# EAGLE board fduino (EAGLE 9.3.1)
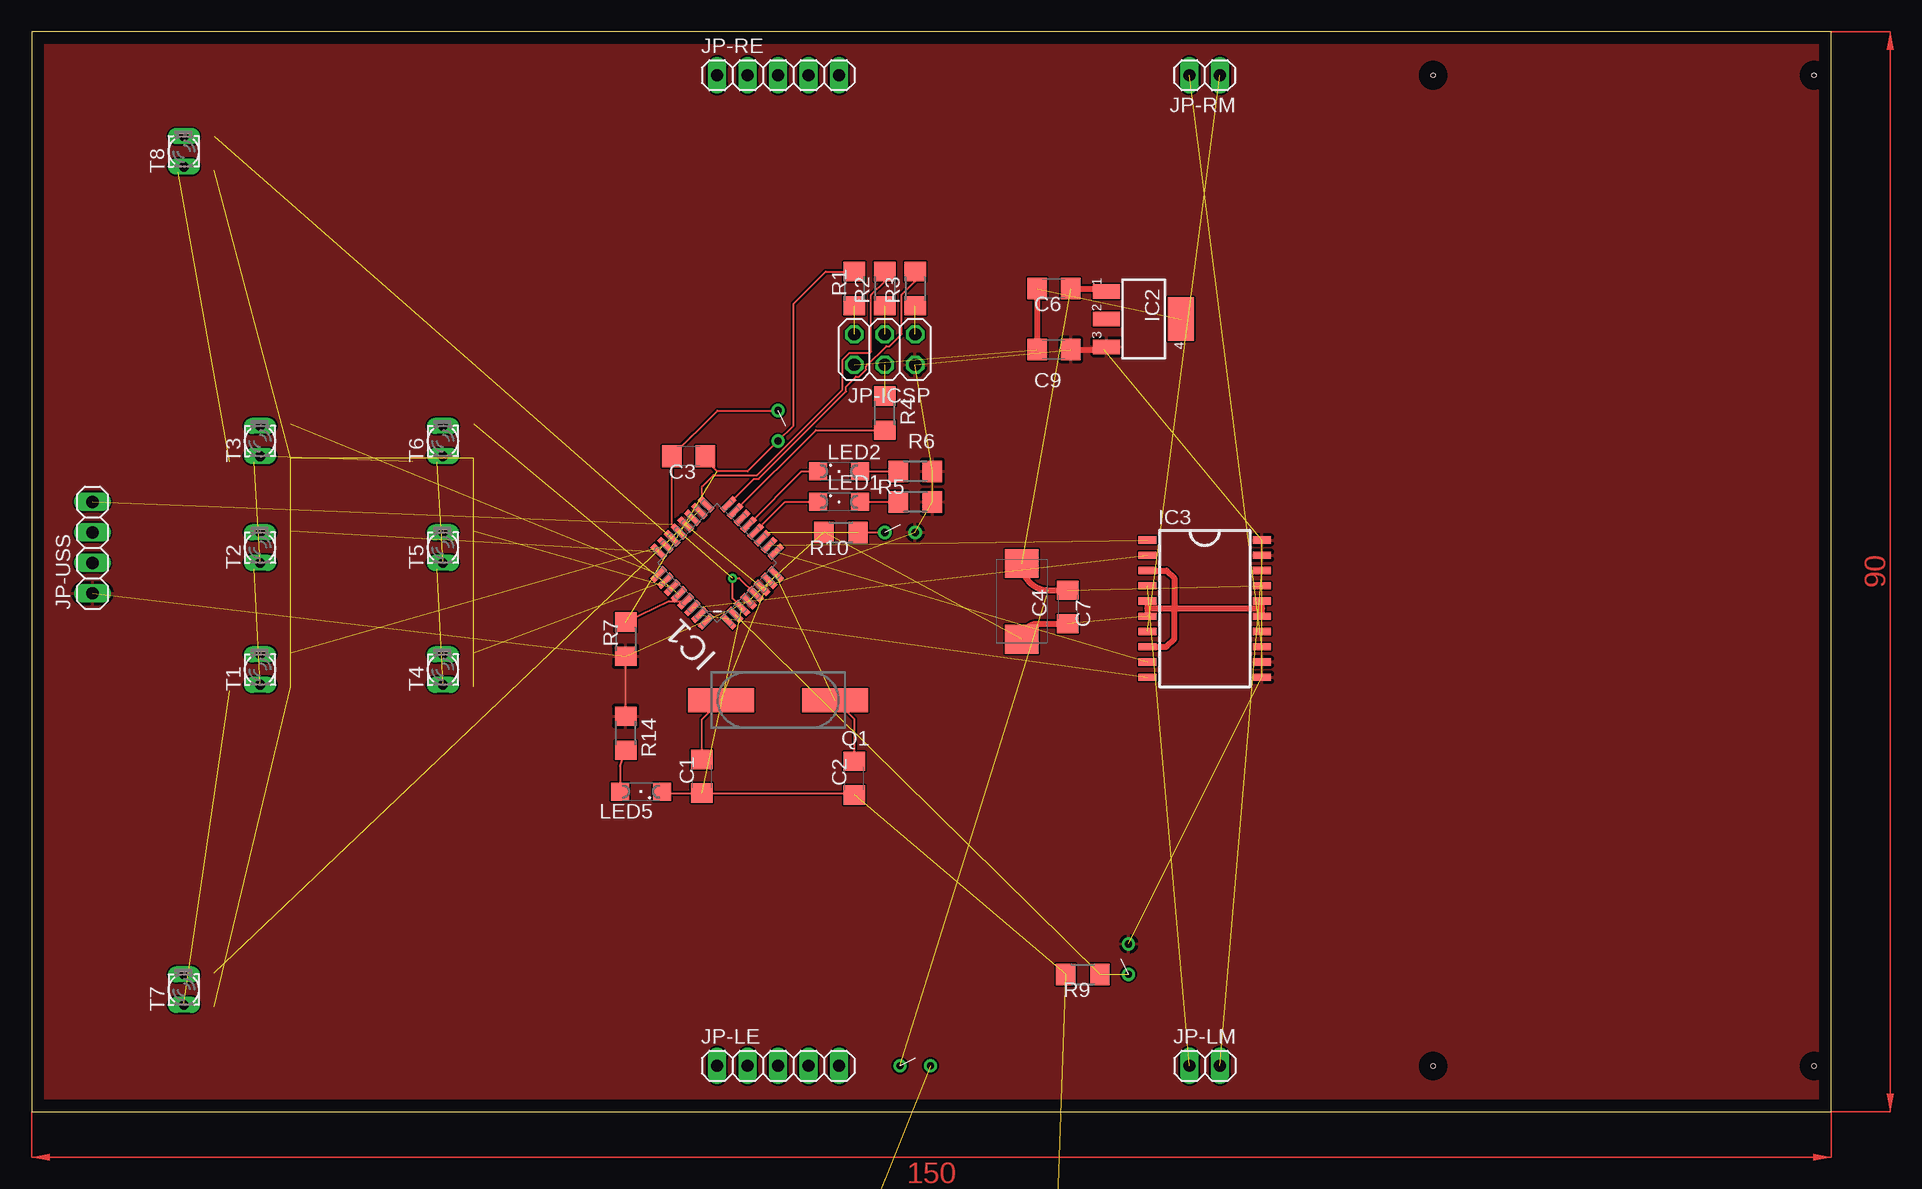
[diagram p0: board, top side]
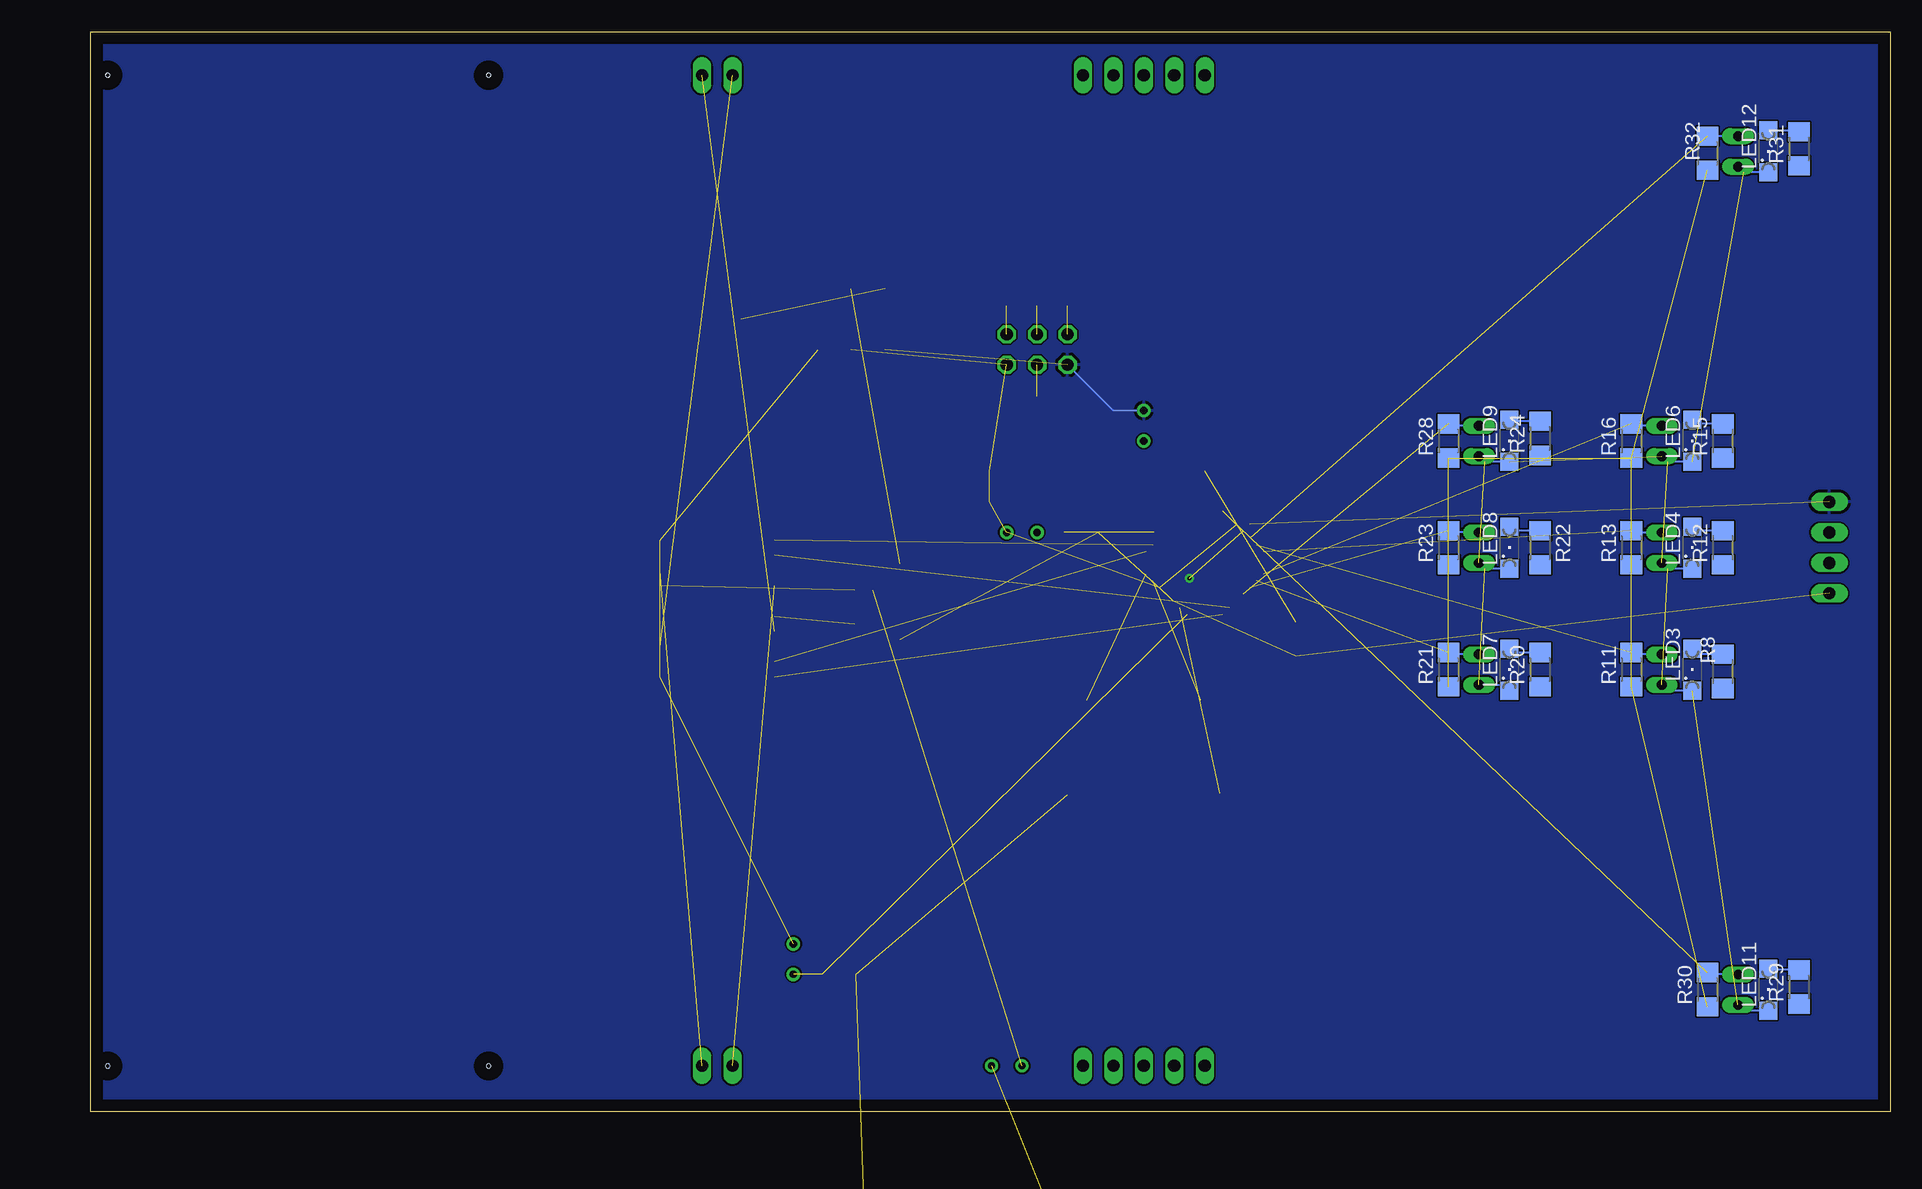
[diagram p1: board, bottom side, seen from below]

Size 150 x 90 mm. Coordinates in mm from the lower left corner, seen from the top.
Outline: 0,0 150,0 150,90 0,90 0,0
Copper layers (1*16): Top 0.035mm / dielectric 1.5mm / Bottom 0.035mm
Design rules "default": minimum track width 6mil, minimum drill 0.35mm, track to track 6mil, track to pad 6mil, pad to pad 6mil, via to via 6mil, smd to smd 6mil, copper to edge 40mil, drill to drill 6mil, minimum pad ring 10mil, minimum via ring 8mil, stop-mask expansion 4mil, vias tented up to drill 0mil, thermal gap 10mil
Holes 0.35 mm at 116.84,3.81 148.59,3.81 116.84,86.36 148.59,86.36

## Footprints (pad centres in the part's own frame; a part is rotated, then mirrored left to right if it is on the bottom)
C1206 = smd 1.6 x 1.8: 1 -1.4,0; 2 1.4,0
SMC_D = smd 2.4 x 2.8: + -3.15,0; - 3.15,0
TQFP32 = smd 1.473 x 0.508: 1 -4.115,2.794; 2 -4.115,2.007; 3 -4.115,1.194; 4 -4.115,0.406; 5 -4.115,-0.406; 6 -4.115,-1.194; 7 -4.115,-2.007; 8 -4.115,-2.794; 17 4.115,-2.794; 18 4.115,-2.007; 19 4.115,-1.194; 20 4.115,-0.406; 21 4.115,0.406; 22 4.115,1.194; 23 4.115,2.007; 24 4.115,2.794 | smd 0.508 x 1.473: 9 -2.794,-4.115; 10 -2.007,-4.115; 11 -1.194,-4.115; 12 -0.406,-4.115; 13 0.406,-4.115; 14 1.194,-4.115; 15 2.007,-4.115; 16 2.794,-4.115; 25 2.794,4.115; 26 2.007,4.115; 27 1.194,4.115; 28 0.406,4.115; 29 -0.406,4.115; 30 -1.194,4.115; 31 -2.007,4.115; 32 -2.794,4.115
SOT223 = smd 1.219 x 2.235: 1 -2.311,-3.099; 2 0,-3.099; 3 2.311,-3.099 | smd 3.6 x 2.2: 4 0,3.099
SO20 = smd 0.6 x 1.5: 1 -5.715,-4.78; 2 -4.445,-4.78; 3 -3.175,-4.78; 4 -1.905,-4.78; 5 -0.635,-4.78; 6 0.635,-4.78; 7 1.905,-4.78; 8 3.175,-4.78; 9 4.445,-4.78; 10 5.715,-4.78; 11 5.715,4.78; 12 4.445,4.78; 13 3.175,4.78; 14 1.905,4.78; 15 0.635,4.78; 16 -0.635,4.78; 17 -1.905,4.78; 18 -3.175,4.78; 19 -4.445,4.78; 20 -5.715,4.78
2X03 = drill 1.016 octagon: 1 -2.54,-1.27; 2 -2.54,1.27; 3 0,-1.27; 4 0,1.27; 5 2.54,-1.27; 6 2.54,1.27
1X05 = drill 1.016 long: 1 -5.08,0; 2 -2.54,0; 3 0,0; 4 2.54,0; 5 5.08,0
1X02 = drill 1.016 long: 1 -1.27,0; 2 1.27,0
1X04 = drill 1.016 long: 1 -3.81,0; 2 -1.27,0; 3 1.27,0; 4 3.81,0
SML1206 = smd 1.5 x 1.5: A 1.75,0; C -1.75,0
CSM-7X-DU = smd 5.5 x 2: 1 -4.75,0; 2 4.75,0
R1206 = smd 1.6 x 1.803: 1 -1.422,0; 2 1.422,0
SWITCH = drill 0.6: P$1 -1.27,0; P$2 1.27,0
BPX81 = drill 0.813 long: C 1.27,0; E -1.27,0
BAT2X18650 = drill 1.6 pad 3: +@1 -38.1,10.16; +@2 -38.1,-8.89; -@1 38.1,10.16; -@2 38.1,-8.89 | hole 3: -29.21,-8.89; 26.67,-8.89; -29.21,10.16; 26.67,10.16

## Placement (x,y rotation side)
C1  22p  [C1206]  55.88,27.94 90 top
C2  22p  [C1206]  68.58,27.79 90 top
C3  100n  [C1206]  54.76,54.61 180 top
C4  100u  [SMC_D]  82.55,42.52 270 top
C6  100n  [C1206]  85.22,68.58 180 top
C7  100n  [C1206]  86.36,42.04 270 top
C9  100n  [C1206]  85.22,63.5 180 top
IC1  ATMEGA328PMA  [TQFP32]  57.15,45.72 135 top
IC2  LF50  [SOT223]  92.71,66.04 270 top
IC3  L6205  [SO20]  97.79,41.91 270 top
JP-ICSP  [2X03]  71.12,63.5 180 top
JP-LE  [1X05]  62.23,3.81 0 top
JP-LM  [1X02]  97.79,3.81 0 top
JP-RE  [1X05]  62.23,86.36 0 top
JP-RM  [1X02]  97.79,86.36 180 top
JP-USS  [1X04]  5.08,46.99 90 top
LED1  Purple  [SML1206]  67.31,50.8 0 top
LED2  Purple  [SML1206]  67.31,53.34 0 top
LED3  White  [SML1206]  16.51,36.83 90 bottom
LED4  White  [SML1206]  16.51,46.99 90 bottom
LED5  Orange  [SML1206]  50.8,26.67 180 top
LED6  White  [SML1206]  16.51,55.88 90 bottom
LED7  White  [SML1206]  31.75,36.83 90 bottom
LED8  White  [SML1206]  31.75,46.99 90 bottom
LED9  White  [SML1206]  31.75,55.88 90 bottom
LED11  White  [SML1206]  10.16,10.16 90 bottom
LED12  White  [SML1206]  10.16,80.01 90 bottom
Q1  CSM-7X-DU  [CSM-7X-DU]  62.23,34.29 180 top
R1  120  [R1206]  68.58,68.58 90 top
R2  120  [R1206]  71.12,68.58 90 top
R3  120  [R1206]  73.66,68.58 90 top
R4  120  [R1206]  71.12,58.2 270 top
R5  680  [R1206]  73.66,50.8 0 top
R6  680  [R1206]  73.66,53.34 0 top
R7  100k  [R1206]  49.53,39.37 90 top
R8  220  [R1206]  13.97,36.68 90 bottom
R9  1k  [R1206]  87.63,11.43 180 top
R10  1k  [R1206]  67.46,48.26 180 top
R11  1k  [R1206]  21.59,36.83 90 bottom
R12  220  [R1206]  13.97,46.99 90 bottom
R13  1k  [R1206]  21.59,46.99 90 bottom
R14  220  [R1206]  49.53,31.53 270 top
R15  220  [R1206]  13.97,55.88 90 bottom
R16  1k  [R1206]  21.59,55.88 90 bottom
R20  220  [R1206]  29.21,36.83 90 bottom
R21  1k  [R1206]  36.83,36.83 90 bottom
R22  220  [R1206]  29.21,46.99 90 bottom
R23  1k  [R1206]  36.83,46.99 90 bottom
R24  220  [R1206]  29.21,56.1 90 bottom
R28  1k  [R1206]  36.83,55.88 90 bottom
R29  220  [R1206]  7.62,10.38 90 bottom
R30  1k  [R1206]  15.24,10.16 90 bottom
R31  220  [R1206]  7.62,80.23 90 bottom
R32  1k  [R1206]  15.24,79.86 90 bottom
SW1  SWITCHTHT  [SWITCH]  62.23,57.15 270 top
SW2  SWITCHTHT  [SWITCH]  91.44,12.7 90 top
SW3  SWITCHTHT  [SWITCH]  72.39,48.26 0 top
SW4  SWITCHTHT  [SWITCH]  73.66,3.81 0 top
T1  BPX81  [BPX81]  19.05,36.83 90 top
T2  BPX81  [BPX81]  19.05,46.99 90 top
T3  BPX81  [BPX81]  19.05,55.88 90 top
T4  BPX81  [BPX81]  34.29,36.83 90 top
T5  BPX81  [BPX81]  34.29,46.99 90 top
T6  BPX81  [BPX81]  34.29,55.88 90 top
T7  BPX81  [BPX81]  12.7,10.16 90 top
T8  BPX81  [BPX81]  12.7,80.01 90 top
U$2  BAT  [BAT2X18650]  40.64,-167.64 0 top  (outside the outline)
U$3  BAT  [BAT2X18650]  40.64,-209.55 0 top  (outside the outline)

## Library data of the parts
C1-C4 C6 C7 C9 = rcl; SPICEPREFIX: C
IC1 IC3 SW1-SW4 U$2 U$3 = martinmake
IC2 = linear
JP-ICSP JP-LE JP-LM JP-RE JP-RM JP-USS = pinhead
LED1-LED9 LED11 LED12 = led
Q1 = crystal; OC_FARNELL: unknown; OC_NEWARK: unknown
R1-R16 R20-R24 R28-R32 = rcl; SPICEPREFIX: R
T1-T8 = opto-trans-siemens; OC_FARNELL: unknown; OC_NEWARK: unknown

## Nets
!RESET: C3.1 IC1.29 R1.2 R7.2 SW1.P$2
!SS: IC1.14
ADC0: IC1.23 R11.2 T1.C
ADC1: IC1.24 R13.2 T2.C
ADC2: IC1.25 R16.2 T3.C
ADC3: IC1.26 R21.2 T4.C
ADC4: IC1.27 R23.2 T5.C
ADC5: IC1.28 R28.2 T6.C
ADC6: IC1.19 R30.2 T7.C
ADC7: IC1.22 R32.2 T8.C
DIRA: IC1.30 IC3.2
DIRB: IC1.31 IC3.10
ECHO: JP-USS.3
GND: C1.1 C2.1 C3.2 C4.- C6.2 C7.2 C9.2 IC1.3 IC1.5 IC1.21 IC2.4 IC3.3 IC3.5 IC3.6 IC3.8 IC3.15 IC3.16 JP-ICSP.6 JP-USS.4 LED5.C R9.2 R10.2 SW1.P$1 U$3.-@1
GND2: LED3.C LED4.C LED6.C LED7.C LED8.C LED9.C LED11.C LED12.C T1.E T2.E T3.E T4.E T5.E T6.E T7.E T8.E
INT0: IC1.32
INT1: IC1.1
MISO: IC1.16 R3.2
MOSI: IC1.15 R4.2
N$1: LED6.A R15.2
N$3: IC3.13 JP-RM.2
N$4: LED2.A R6.1
N$5: LED1.A R5.1
N$6: IC3.7 JP-RM.1
N$7: IC3.4 JP-LM.1
N$8: IC3.18 JP-LM.2
N$9: U$3.+@1 U$3.-@2
N$10: U$2.+@1 U$2.-@2
N$12: LED7.A R20.2
N$13: JP-LE.5
N$14: SW4.P$2 U$2.+@2
N$15: U$2.-@1 U$3.+@2
N$22: LED12.A R31.2
N$23: LED8.A R22.2
N$24: R20.1
N$26: JP-LE.4
N$27: LED9.A R24.2
N$28: R22.1
N$29: JP-LE.3
N$30: LED11.A R29.2
N$31: JP-LE.2
N$32: R15.1
N$33: JP-ICSP.1 R3.1
N$34: JP-LE.1
N$35: R24.1
N$36: LED5.A R14.2
N$37: JP-RE.1
N$38: R29.1
N$39: JP-RE.3
N$40: R12.1
N$41: R31.1
N$42: R11.1 R13.1 R16.1 R21.1 R23.1 R28.1 R30.1 R32.1
N$43: LED4.A R12.2
N$44: JP-RE.2
N$45: R8.1
N$46: JP-RE.5
N$47: LED3.A R8.2
N$48: JP-RE.4
N$49: JP-ICSP.3 R2.1
N$50: JP-ICSP.5 R1.1
N$51: JP-ICSP.4 R4.1
OC0A: IC1.10 IC3.1
OC0B: IC1.9 IC3.9
PB0: IC1.12 LED1.C
PB1: IC1.13 LED2.C
SCK: IC1.17 R2.2
SW1: IC1.2 R9.1 SW2.P$1
SW2: IC1.11 R10.1 SW3.P$1
TRIG: JP-USS.2
VCC: C9.1 IC1.4 IC1.6 IC1.18 IC1.20 IC2.3 IC3.11 IC3.12 IC3.19 IC3.20 JP-ICSP.2 JP-USS.1 R5.2 R6.2 R7.1 R14.1 SW2.P$2 SW3.P$2
VM: C4.+ C6.1 C7.1 IC2.1 IC3.14 IC3.17 SW4.P$1
XTAL1: C1.2 IC1.7 Q1.2
XTAL2: C2.2 IC1.8 Q1.1

## Tracks (layer width: path | path; a pad name or v marks a point on that pad's centre or on a via)
!RESET  (1 unrouted)
  Top 0.152: IC1.29 53.15,42.52 R7.2 | C3.1 56.16,54.33 57.15,53.34 59.69,53.34 SW1.P$2 63.5,57.15 63.5,67.31 66.19,70 R1.2
ADC0  (1 unrouted)
  Bottom 0.152: T1.C 21.44,38.1 R11.2
ADC1  (1 unrouted)
  Bottom 0.152: R13.2 21.44,48.26 T2.C
ADC2  (1 unrouted)
  Bottom 0.152: T3.C 21.44,57.15 R16.2
ADC3  (1 unrouted)
  Bottom 0.152: T4.C 36.68,38.1 R21.2
ADC4  (1 unrouted)
  Bottom 0.152: T5.C 36.68,48.26 R23.2
ADC5  (1 unrouted)
  Bottom 0.152: T6.C 36.68,57.15 R28.2
ADC6  (1 unrouted)
  Bottom 0.152: T7.C 15.09,11.43 R30.2
ADC7  (1 unrouted)
  Bottom 0.152: T8.C R32.2
DIRA  (1 unrouted)
DIRB  (1 unrouted)
GND  (via drill 0.35)  (10 unrouted)
  Top 0.152: IC1.5 | IC1.3 58.42,42.76 v58.42,44.45 58.99,44.45 IC1.5 | C2.1 68.43,26.54 C1.1 52.68,26.54 LED5.C | IC1.21 53.36,48.93 C3.2 57.17,58.42 SW1.P$1
  Top 0.5: C4.- arc-90 83.82,40.64 C7.2 | C6.2 C9.2 | IC3.5 93.01,41.91 | 93.01,41.91 IC3.6 | IC3.15 102.57,41.91 | 102.57,41.91 IC3.16 | 102.57,41.91 95.25,41.91 | 95.25,41.91 93.01,41.91 | IC3.3 94.61,45.09 95.25,44.45 95.25,41.91 | IC3.8 94.61,38.73 95.25,39.37 95.25,41.91
  Bottom 0.152: SW1.P$1 64.77,58.42 JP-ICSP.6
  pour Bottom: 0,0 150,0 150,90 0,90
GND2  (7 unrouted)
  Bottom 0.152: LED4.C 18.57,45.24 T2.E | LED6.C 18.57,54.13 T3.E | LED12.C 12.22,78.26 T8.E | LED9.C 33.81,54.13 T6.E | LED8.C 33.81,45.24 T5.E | LED3.C 18.57,35.08 T1.E | T4.E 32.23,35.56 LED7.C | LED11.C 12.22,8.41 T7.E
MISO
  Top 0.152: R3.2 73.66,69.18 72.53,68.05 72.53,64.78 71.53,63.78 71.26,63.78 69.57,62.09 69.57,61.82 68.99,61.24 68.72,61.24 67.89,60.42 67.89,60.01 60.62,52.73 60.21,52.73 IC1.16
MOSI
  Top 0.152: IC1.15 65.37,56.78 R4.2
N$1
  Bottom 0.152: R15.2 16.18,57.3 LED6.A
N$3  (1 unrouted)
N$4
  Top 0.152: LED2.A R6.1
N$5
  Top 0.152: LED1.A R5.1
N$6  (1 unrouted)
N$7  (1 unrouted)
N$8  (1 unrouted)
N$9  (1 unrouted)
N$10  (1 unrouted)
N$12
  Bottom 0.152: R20.2 31.42,38.25 LED7.A
N$14  (1 unrouted)
N$15  (1 unrouted)
N$22
  Bottom 0.152: LED12.A 7.73,81.76 R31.2
N$23
  Bottom 0.152: R22.2 31.42,48.41 LED8.A
N$27
  Bottom 0.152: R24.2 31.64,57.52 LED9.A
N$30
  Bottom 0.152: R29.2 10.05,11.8 LED11.A
N$33  (1 unrouted)
N$36
  Top 0.152: LED5.A 49.05,28.79 R14.2
N$42  (7 unrouted)
N$43
  Bottom 0.152: R12.2 16.18,48.41 LED4.A
N$47
  Bottom 0.152: R8.2 16.03,38.1 LED3.A
N$49  (1 unrouted)
N$50  (1 unrouted)
N$51  (1 unrouted)
OC0A  (1 unrouted)
OC0B  (1 unrouted)
PB0
  Top 0.152: IC1.12 62.8,50.8 LED1.C
PB1
  Top 0.152: IC1.13 64.19,53.34 LED2.C
SCK
  Top 0.152: IC1.17 55.88,50.94 55.88,52.07 56.84,53.03 60.49,53.03 67.59,60.13 67.59,62.64 68.17,63.22 69.88,63.22 69.99,63.34 69.99,68.05 71.12,69.18 R2.2 70.61,70
SW1  (2 unrouted)
SW2  (1 unrouted)
  Top 0.152: IC1.11 61.38,48.26 | R10.1 SW3.P$1
VCC  (15 unrouted)
  Top 0.152: R14.1 R7.1
  Top 0.5: C9.1 89.38,63.5 IC2.3
  pour Top: 0,90 150,90 150,0 0,0
VM  (4 unrouted)
  Top 0.152: 89.38,68.58 IC2.1
  Top 0.5: C4.+ arc90 84.78,43.44 C7.1 | C6.1 89.38,68.58
XTAL1  (1 unrouted)
  Top 0.152: C1.2 55.88,32.69 Q1.2
XTAL2  (1 unrouted)
  Top 0.152: C2.2 68.58,32.69 Q1.1
(copper drawn outside any net)
  shapes: Top area x2